# EAGLE board cell-pcb v40 (EAGLE 9.7.0)
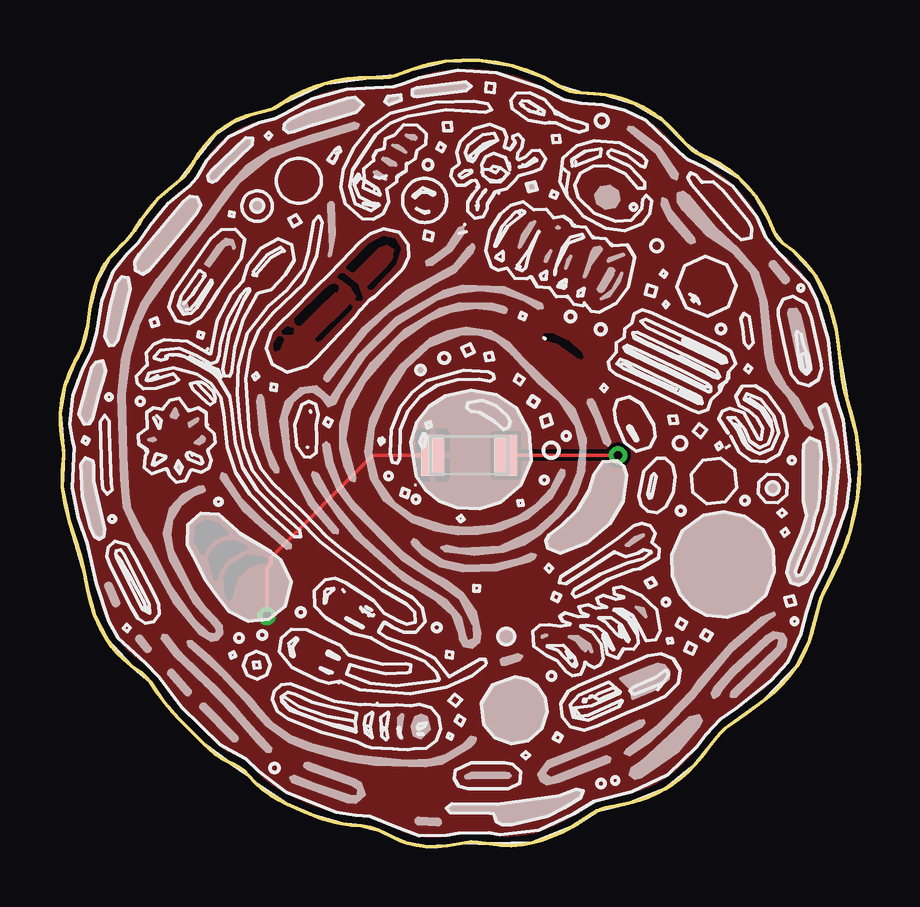
[diagram p0: board, top side]
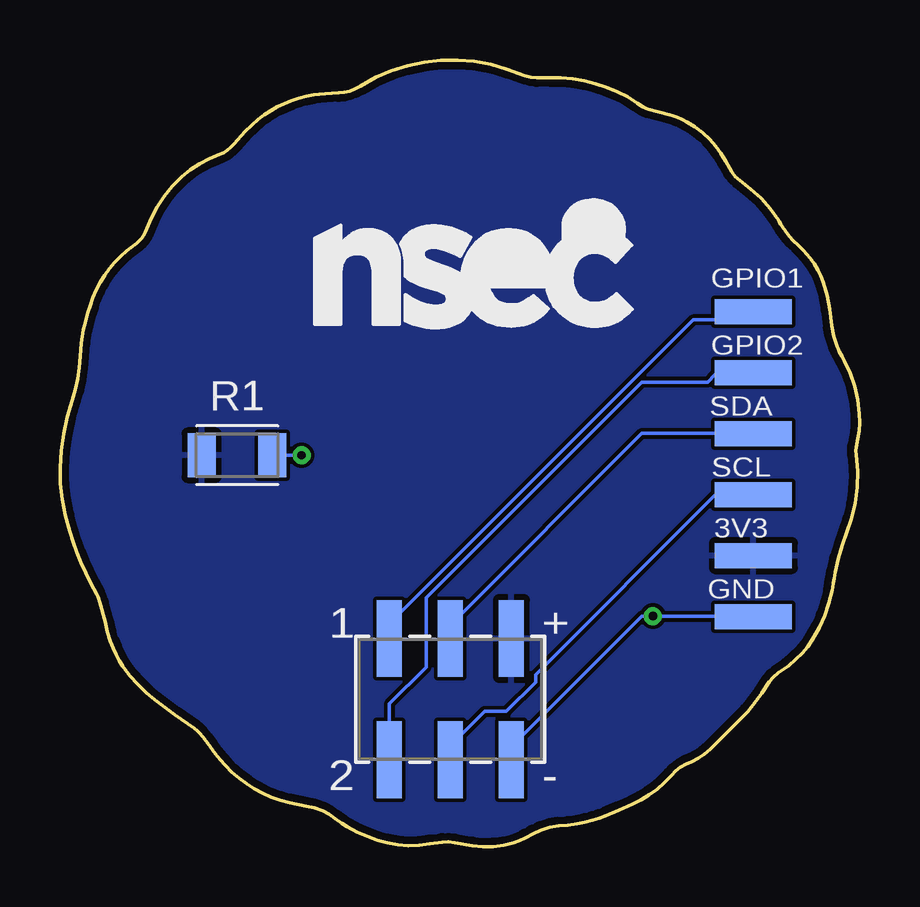
[diagram p1: board, bottom side, seen from below]

Size 33.32 x 32.78 mm. Coordinates in mm from the lower left corner, seen from the top.
Outline: 30.12,25.16 30.01,25.25 29.91,25.36 29.82,25.49 29.76,25.61 29.52,26.2 29.28,26.67 28.98,27.11 28.64,27.53 28.25,27.93 27.89,28.21 27.51,28.46 27.09,28.67 26.67,28.85 26.49,28.93 26.35,29.03 26.21,29.14 26.09,29.28 25.59,29.82 25.33,30.07 25.06,30.31 24.8,30.5 24.53,30.68 24.26,30.83 23.97,30.97 23.68,31.09 23.38,31.19 23.07,31.27 22.75,31.33 22.52,31.36 22.27,31.38 22,31.4 21.71,31.41 21.48,31.44 21.25,31.49 21.02,31.58 20.81,31.68 20.15,32.06 19.51,32.33 18.84,32.54 18.15,32.69 17.45,32.77 16.75,32.78 16.06,32.73 15.37,32.6 14.7,32.4 13.95,32.13 13.71,32.07 13.46,32.04 12.93,32.05 12.44,32.04 11.96,32 11.48,31.92 11.01,31.8 10.55,31.65 10.1,31.47 9.67,31.25 9.26,30.99 9.03,30.84 8.92,30.78 8.81,30.74 7.94,30.51 7.79,30.46 7.61,30.39 7.41,30.31 7.19,30.2 6.86,30 6.54,29.75 6.25,29.48 6,29.19 5.78,28.89 5.58,28.56 5.33,28.12 5.18,27.93 5,27.77 4.53,27.41 4.1,27.02 3.72,26.6 3.39,26.12 3.34,26.05 3.28,25.95 3.2,25.82 3.09,25.66 2.93,25.44 2.76,25.26 2.55,25.06 2.36,24.87 2.2,24.69 2.05,24.52 1.89,24.29 1.74,24.04 1.62,23.79 1.51,23.52 1.35,22.97 1.25,22.4 1.2,22.06 1.16,21.71 1.08,21.27 0.94,20.83 0.9,20.76 0.84,20.63 0.75,20.47 0.64,20.25 0.39,19.73 0.2,19.19 0.08,18.62 0.01,18.03 0,17.67 0.02,17.33 0.07,16.99 0.15,16.65 0.16,16.5 0.15,16.34 0.09,15.66 0.1,14.98 0.19,14.31 0.36,13.64 0.72,12.56 0.89,12 1.02,11.45 1.06,11.19 1.1,10.98 1.13,10.82 1.15,10.7 1.28,10.16 1.46,9.63 1.69,9.12 1.96,8.62 2.16,8.34 2.39,8.07 2.66,7.81 2.96,7.55 3.4,7.25 3.6,7.07 3.77,6.87 4.07,6.41 4.37,5.99 4.67,5.63 4.96,5.33 6,4.29 6.23,4.06 6.47,3.86 6.72,3.69 7,3.55 7.25,3.44 7.47,3.31 7.67,3.16 7.85,2.97 8.14,2.67 8.44,2.4 8.76,2.17 9.11,1.97 9.46,1.78 10.03,1.52 10.58,1.29 10.85,1.2 11.14,1.11 11.44,1.03 11.77,0.95 12.15,0.9 12.54,0.88 12.91,0.82 13.29,0.7 13.6,0.55 13.92,0.38 14.18,0.25 14.4,0.17 14.84,0.06 15.27,0 15.7,0 16.14,0.05 16.88,0.18 17.13,0.2 17.4,0.2 17.92,0.13 18.36,0.07 18.81,0.05 19.25,0.09 19.68,0.16 20.1,0.28 20.52,0.43 20.93,0.61 21.34,0.83 21.59,0.99 21.84,1.17 22.11,1.36 22.38,1.5 22.72,1.62 23.07,1.7 23.75,1.83 24.14,1.94 24.51,2.07 24.87,2.23 25.22,2.41 25.54,2.62 25.86,2.86 26.15,3.11 26.44,3.4 26.63,3.62 26.84,3.88 27.06,4.16 27.29,4.47 27.48,4.72 27.61,4.84 27.72,4.93 28.53,5.49 29.36,6.12 29.73,6.43 30.09,6.76 30.42,7.13 30.7,7.52 30.84,7.75 30.98,8 31.1,8.28 31.22,8.56 31.34,8.96 31.44,9.37 31.65,10.18 31.73,10.4 31.79,10.53 32.03,10.98 32.25,11.42 32.44,11.85 32.62,12.28 32.77,12.69 32.92,13.15 33.1,13.82 33.23,14.47 33.3,15.13 33.32,15.79 33.27,16.51 33.17,17.22 33.02,17.92 32.81,18.61 32.68,19.05 32.59,19.5 32.53,19.97 32.48,20.44 32.43,20.99 32.34,21.54 32.29,21.76 32.23,22 32.16,22.26 32.07,22.55 31.95,22.89 31.8,23.21 31.64,23.52 31.46,23.81 31.26,24.09 31.04,24.35 30.8,24.6 30.55,24.83 30.12,25.16
Copper layers (1*16): Top 0.035mm / dielectric 1.5mm / Bottom 0.035mm
Design rules "default *": minimum track width 6mil, minimum drill 0.35mm, track to track 6mil, track to pad 6mil, pad to pad 6mil, via to via 6mil, smd to smd 6mil, copper to edge 0.3mm, drill to drill 6mil, minimum pad ring 10mil, minimum via ring 8mil, stop-mask expansion 4mil, vias tented up to drill 0mil, thermal gap 10mil
tRestrict: 138 lines

## Footprints (pad centres in the part's own frame; a part is rotated, then mirrored left to right if it is on the bottom)
LEDC3216X75N_FLAT-R = smd 0.962 x 1.712: A 1.525,0; C -1.525,0
CONN6_M20-8760342_HRW = smd 1.041 x 3.2: 1 -2.54,2.525; 2 -2.54,-2.525; 3 0,2.525; 4 0,-2.525; 5 2.54,2.525; 6 2.54,-2.525
SAOPADBREAKOUT = smd 1.041 x 3.2: 1 -6.35,0; 2 -3.81,0; 3 -1.27,0; 4 1.27,0; 5 3.81,0; 6 6.35,0
RESC3216X70 = smd 1.165 x 1.815: 1 -1.475,0; 2 1.475,0

## Placement (x,y rotation side)
D1  LED_RED  [LEDC3216X75N_FLAT-R]  17.05,16.31 0 top
J1  M20-8760342CONN6_M20-8760342_HRW  [CONN6_M20-8760342_HRW]  17.05,6.15 0 bottom
J2  SAOPADBREAKOUT  [SAOPADBREAKOUT]  4.43,15.94 270 bottom
R1  [RESC3216X70]  25.94,16.31 0 bottom

## Library data of the parts
D1 = led; CATEGORY: LED; COLOR: RED; DESCRIPTION: CHIP LED FLAT; SUB-CATEGORY: CHIP; TYPE: FLAT_TOP
J1 = Library; COPYRIGHT: Copyright (C) 2024 Ultra Librarian. All rights reserved.; MANUFACTURER_PART_NUMBER: M20-8760342; MFR_NAME: Harwin
J2 = Library
R1 = Resistor; CATEGORY: Resistor; SUB-CATEGORY: Fixed

## Nets
3V3: J1.5 J2.5 R1.1
GND: D1.C J1.6 J2.6
GPIO1: J1.1 J2.1
GPIO2: J1.2 J2.2
NS$1: D1.A R1.2
SCL: J1.4 J2.4
SDA: J1.3 J2.3

## Tracks (layer width: path | path; a pad name or v marks a point on that pad's centre or on a via)
3V3
  pour Bottom: 34.76,36.45 33.6,35.3 33.58,35.29 -3.24,35.29 -4.46,34.06 -4.46,-7.74 39.73,-7.74 34.77,-2.78 34.76,-2.75
GND  (via drill 0.35)
  Top 0.152: v8.62,9.61 8.62,11.59 8.77,11.74 8.77,12.05 13.04,16.31 D1.C
  Bottom 0.152: J2.6 4.5,9.61 v8.62,9.61 9.08,9.61 14.41,4.27 14.41,3.67 J1.6
  pour Top: -1.92,-6.47 34.76,-6.47 34.76,35.29 -1.92,35.29
GPIO1
  Bottom 0.152: J1.1 19.59,9.3 6.94,21.95 4.81,21.95 4.5,22.26 J2.1
GPIO2
  Bottom 0.152: J1.2 19.59,5.95 18.07,7.48 18.07,10.37 9.08,19.36 6.33,19.36 6.03,19.67 4.5,19.67 J2.2
NS$1  (via drill 0.35)
  Top 0.152: v23.25,16.31 D1.A
  Bottom 0.152: R1.2 v23.25,16.31
SCL
  Bottom 0.152: J2.4 4.5,14.64 6.03,14.64 13.5,7.17 13.5,6.87 14.71,5.65 15.63,5.65 17,4.27 17,3.67 J1.4
SDA
  Bottom 0.152: J2.3 4.5,17.23 9.08,17.23 17,9.3 17,8.69 J1.3

## Text on the board
bStop: cell